# Altium PCB 5V-REG.PcbDoc
Units mil, origin at the board's own origin, x right, y up, seen from the top; angles counter-clockwise.
Board outline 2660 x 665 mil, 2 copper layers (Top Layer, Bottom Layer); 8 components, 4 nets, 17 pads, 0 vias.
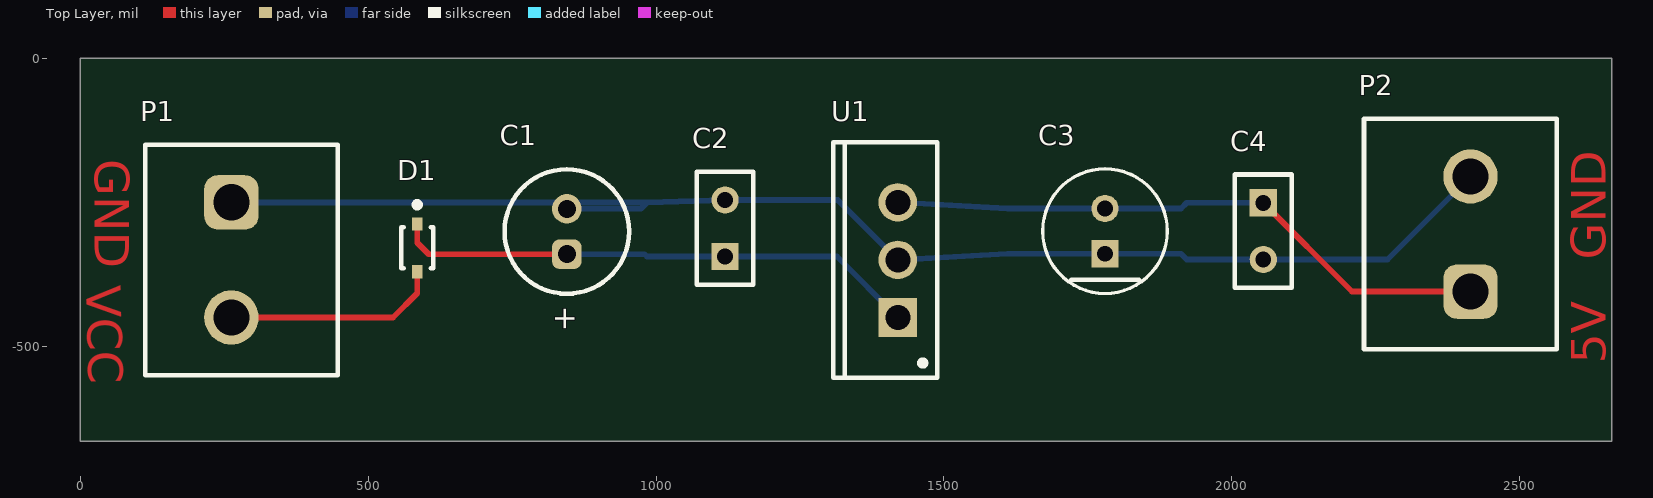
[diagram p0: Top Layer view]
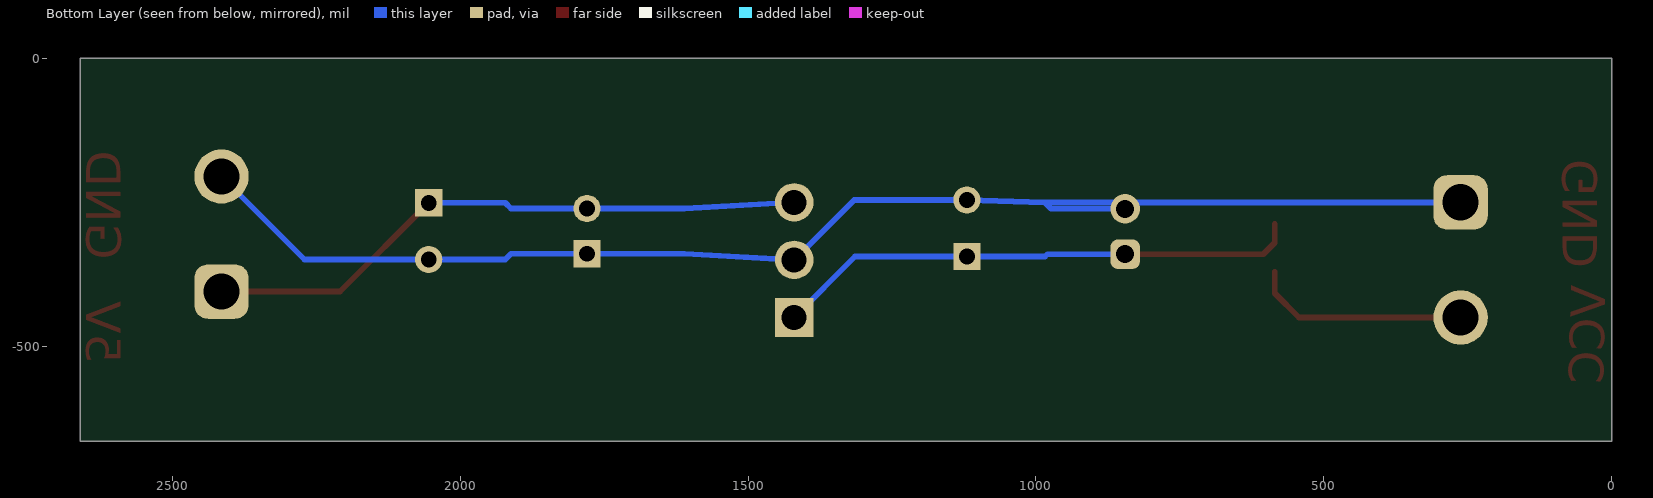
[diagram p1: Bottom Layer view, seen from below]

## Layer stack, top to bottom
Top Solder: solder mask 0.4, Solder Resist, Dk 3.5
Top Layer: signal copper 1.4
Dielectric 1: dielectric 12.6, FR-4, Dk 4.8
Bottom Layer: signal copper 1.4
Bottom Solder: solder mask 0.4, Solder Resist, Dk 3.5

## Board outline
0,-665 0,0 2660,0 2660,-665

## Design rules (kind name [scope] priority, off if disabled: settings)
Clearance [All] p1: gap=10 ignorepadtopadclearanceinfootprint=FALSE except(0: Arc-Hole Track-Hole SMDPad-Hole THPad-Hole Via-Hole Fill-Hole Poly-Hole Region-Hole Text-Hole)
PolygonConnect [All] p1: connectstyle=Relief reliefconductorwidth=10 reliefentries=4 polygonreliefangle="90 Angle" airgapwidth=10
RoutingVias [All] p1: holewidth=28 width=50 viastyle="Through Hole" minholewidth=28 minwidth=50 maxholewidth=28 maxwidth=50
SilkToSolderMaskClearance [IsPad] p1: minsilkscreentomaskgap=5 clearancetoexposedcopper=TRUE
SolderMaskExpansion [All] p1: expansion=4 istentingtop=FALSE
Width [All] p1: maxlimit=10 minlimit=10 preferedwidth=10
29 further rules are at their usual default settings.

## Components (designator, comment, footprint, x,y, rotation, side; value= is the part's Value field where it differs from the comment)
C1 "0.22uF" WCAP-ATG8_D5H11 50845,-50300.63 r270 top
C2 "0.1uF" FP-RDE0P1-MFG 1120,-295 r90 top
C3 "10uF" FP-RAD-TH-D_5_0_5-L_11_1-MFG 1780,-300 r90 top
C4 "0.1uF" FP-RDE0P1-MFG 2055,-300 r270 top
D1 "SD103AWS-7-F" FP-SOD323-MFG 585,-329 r270 top value=35pF
P1 "691311500002" 691311500002 280,-350 r270 top
P2 "691311500002" 691311500002 2397.28,-305 r90 top
U1 "L7805CV" TO220 1420,-350 r90 top

## Footprints (in the part's own frame and the unit in brackets; to place one, negate y for a bottom-side part, rotate by r counter-clockwise, add the part's x,y. Pads: shape width x height; smd on the part's side, far side on the other; paste and mask are expansions set on the pad)
691311500002 [mm] "5,08mm - PCB Headers - Vertical - Opened ends -02p"
  rrect50% 2.4x2.4 hole 1.6: 1(-2.54,-0.45)
  round 2.4 hole 1.6: 2(2.54,-0.45)
  silkscreen extent -5.08,-4.25 5.08,4.25, body extent -5.08,-4.25 5.08,4.25, height 12.05
FP-RAD-TH-D_5_0_5-L_11_1-MFG [mm]
  rect 1.2x1.2 hole 0.7 paste-2539.97 mask+0: 1(-1,0)
  round 1.2 hole 0.7 paste-2539.97 mask+0: 2(1,0)
  silkscreen extent -2.75,-2.75 2.75,2.75, body extent -2.85,-2.85 2.85,2.85, height 0.25
FP-RDE0P1-MFG [mm]
  rect 1.2x1.2 hole 0.7 paste-2539.97 mask+0: 1(-1.25,0)
  round 1.2 hole 0.7 paste-2539.97 mask+0: 2(1.25,0)
  silkscreen extent -2.5,-1.25 2.5,1.25, body extent -2.6,-1.35 2.6,1.35, height 0.25
FP-SOD323-MFG [mm]
  rect 0.59x0.45 smd paste+0 mask+0: 1(-1.055,0) 2(1.055,0)
  silkscreen extent -2.02,-0.7 0.9,0.7, body extent -1.45,-0.8 1.45,0.8, height 0.25
TO220 [mm] "TO, Thru-Hole, Vertical, Heatsink Mounted; 3 In-Line Leads; Pitch 2.54 mm"
  rect 1.7x1.7 hole 1.1: 1(-2.54,0)
  round 1.7 hole 1.1: 2(0,0) 3(2.54,0)
  silkscreen extent -5.2,-1.75 5.2,2.85, body extent -5.25,-1.8 5.25,2.9, height 19.7
WCAP-ATG8_D5H11 [mm] "Aluminum Electrolytic Capacitors, 5x11mm"
  rrect50% 1.3x1.3 hole 0.8: 1(-1269,-1270)
  round 1.3 hole 0.8: 2(-1271,-1270)
  silkscreen extent -1272.75,-1272.75 -1267.25,-1267.25, body extent -1272.49,-1272.5 -1267.5,-1267.5, height 11.31

## Part data
C1: library part CMP-03913-54007281-1, "860010772002 WCAP-ATG8 Aluminum Electrolytic Capacitors", Capacitance=220nF, Case/Package=Radial, Leakage Current=3µA, Max Operating Temperature=85°C, Min Operating Temperature=-40°C, Ripple Current=4mA, Tolerance=20%, Voltage Rating=63V, Diameter=5mm, Dissipation Factor=9%, Height=11mm, Height - Seated (Max)=12.4968mm, Lead Pitch=2.0066mm, Length=11mm, Life (Hours)=2000hours, Mount="Through Hole", NexarPartId=54007281, Packaging="Tape & Box (TB)", Pitch=2mm, Polarity=Polar, REACH SVHC=Unknown, RoHS=Compliant, Voltage Rating (DC)=63V
C2 C4: library part CMP-06035-036375-1, "Ceramic Capacitor 100nF ±10% 25V X7R Radial", Capacitance=100nF, Case/Package=Radial, Dielectric=X7R, Max Operating Temperature=125°C, Min Operating Temperature=-55°C, Package Quantity=500, Resistor Type=Ceramic, Tolerance=10%, Voltage Rating=25V, Height=3.5mm, Height - Seated (Max)=0.236inch, Lead Diameter=0.5mm, Lead Free="Lead Free", Lead Pitch=0.098inch, Length=0.197inch, Mount="Through Hole", Packaging=Bulk, Termination=Radial, Voltage Rating (DC)=25V, Width=0.098inch
C3: library part CMP-05427-001295-1, "Aluminum Electrolytic Capacitors (Radial Lead Type) 10uF ±20% 50V", Case/Package=Radial, Max Operating Temperature=105°C, Min Operating Temperature=-40°C, Ripple Current (AC)=250mA, Tolerance=20%, Voltage=50V, Capacitance=10uF, Construction=RADIAL, Diameter=5mm, Height=11mm, Impedance=340mR, Lead Diameter=0.5mm, Lead Pitch=2mm, Life (Hours)=5000Hour, REACH SVHC=Yes, RoHS Compliant=Yes, Series="FR Radial", Termination=Radial, Voltage Rating=50V
D1: library part CMP-12790-000048-1, "DIODE SCHOTTKY 40V 350MA SOD323", Capacitance=35pF, Forward Current=350mA, Manufacturer="Diodes Inc.", Max Junction Temp=+125°C, Max Repetitive Reverse Voltage=40V, Max Surge Forward Current=1.5A, Package=SOD323, Peak Reverse Current=5uA, Temperature="-65°C to +125°C", Temperature Range Low=-65°C, Automotive=Yes, Automotive Grade="Grade 1", Category=Diode, ComponentLink2Description=Datasheet, ComponentLink2URL=https://www.diodes.com/assets/Datasheets/ds30101.pdf, Device Class L1="Discrete Semiconductors", Device Class L2=Diodes, Device Class L3="Schottky Diodes", Digikey Description="DIODE SCHOTTKY 40V 350MA SOD323", Footprint Url=https://www.diodes.com/assets/Package-Files/SOD323.pdf, Height=1.2mm, Ipc Land Pattern Name=SOD250130X110-2, Lead Free=Yes, Manufacturer Part Number=SD103AWS-7-F, Mouser Description="Schottky Diodes & Rectifiers 40V 200mW", Octopart=https://octopart.com/sd103aws-7-f-diodes+inc.-55389602, Reverse Voltage=40V, RoHS=TRUE, Standoff Height=0.05mm, Temperature Range High=+125°C
P1 P2: library part CMP-1502-02123-2, Color=Green, Current=20A, Voltage=300V, Contact Material=Brass, Contact Plating=Tin, Gender=Male, Height=12mm, Lead Pitch=5.08mm, Length=8.5mm, Mount="Through Hole", NexarPartId=8917741, Number of Contacts=2, Number of Levels=1, Number of Pins=2, Number of Positions Per Level=2, Number of Rows=1, Orientation=Vertical, Packaging=Box, Pitch=5.08mm, REACH SVHC=Unknown, RoHS=Compliant, Termination=Solder, Width=10.16mm
U1: library part CMP-0244-00483-1, "Positive Voltage Regulator, 5V, 3-Pin TO-220", ComponentLink1Description="Manufacturer URL", ComponentLink1URL=http://www.st.com, ComponentLink2Description=Datasheet, ComponentLink2URL=http://www.st.com/internet/com/TECHNICAL_RESOURCES/TECHNICAL_LITERATURE/DATASHEET/CD00000444.pdf, ComponentLink3Description="Package Specification", ComponentLink3URL=http://www.st.com/internet/com/TECHNICAL_RESOURCES/TECHNICAL_LITERATURE/PACKAGE_INFORMATION/CD00004649.pdf, DatasheetVersion=16/11/2011, PackageDescription="TO, Thru-Hole, Vertical, Heatsink Mounted; 3 In-Line Leads; Pitch 2.54 mm", PackageReference=TO220, PackageVersion=ver3.0

## Nets (pads, with @x,y where several pads share a name; then routed paths per layer and width w, separated by ;. In a path a pad name is that pad's centre, name@x,y a point inside that pad or via, vN(x,y) a via of type N, cw(c..) or ccw(c..) an arc to the next point about the centre after c; other vN are vias at no path point)
5V: C3.2 C4.1 P2.1 U1.3 | length 1063.2
  Top Layer w10: C4.1 2209.21,-405 P2.1
  Bottom Layer w10: U1.3 1610.63,-260.63 C3.2 1912,-260.63 1921.84,-250.79 C4.1
GND: C1.2 C2.2 C3.1 C4.2 P1.1 P2.2 U1.2 | length 2405
  Bottom Layer w10: P1.1 985.26,-250 ; C1.2 974,-261.26 985.26,-250 ; P2.2 2270.79,-349.21 C4.2 1921.84,-349.21 1912,-339.37 C3.1 1610.63,-339.37 U1.2 1315.79,-245.79 C2.2 985.26,-250
NetC1_1: C1.1 C2.1 D1.1 U1.1 | length 921.4
  Top Layer w10: D1.1 585,-320 605,-340 C1.1
  Bottom Layer w10: C1.1 980,-340 984.21,-344.21 C2.1 1314.21,-344.21 U1.1
VCC: D1.2 P1.2 | length 377.6
  Top Layer w10: P1.2 543,-450 585,-408 D1.2

## Other copper
Top Layer:
  text "GND" at 25,-175 h60 r270
  text "GND" at 2650,-350 h60 r90
  text "VCC" at 10,-395 h60 r271.3
  text "5V" at 2650,-530 h60 r90
  text "GND" at 4007.44,-804.84 h60 r90
  text "5V" at 4007.44,-984.84 h60 r90

## Silkscreen, mask and mechanical layers (free items; w line width, h text height)
CUTOT:
  the board outline again, w10

## Text inside footprints (layer, text, board x,y; h text height)
C1: Top Overlay "+" at 825,-430 h39.37 r270